# EAGLE board IO4-IR-Detector-Active-FingersN (EAGLE 7.7.0)
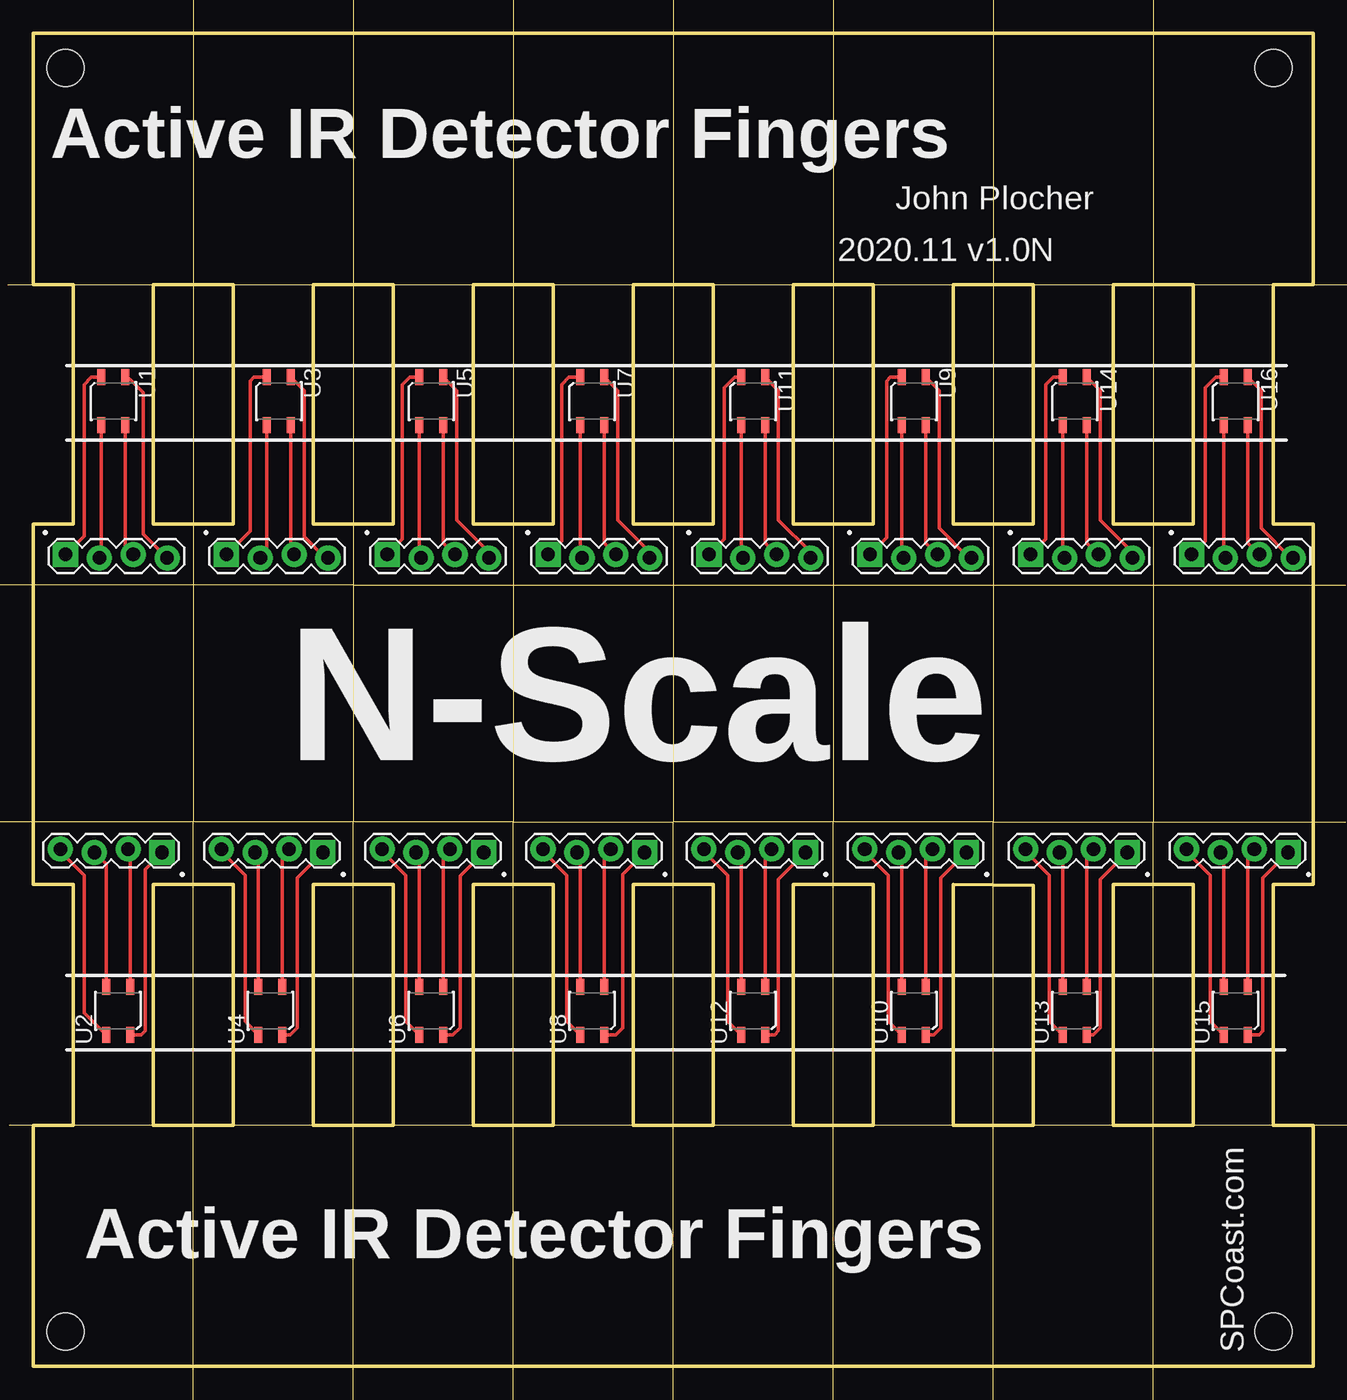
[diagram p0: board, top side]

Size 96 x 100 mm. Coordinates in mm from the lower left corner, seen from the top.
Outline: 9,63.18 9,81.15 15,81.15 15,63.18 9,63.18
Outline: 3,81.15 3,63.18 0,63.18 0,36.13 3,36.13 3,18.09 0,18.09 0,0 96,0 96,18.09 93,18.09 93,36.13 96,36.13 96,63.18 93,63.18 93,81.15 96,81.15 96,100 0,100 0,81.15 3,81.15
Outline: 9,18.09 9,36.13 15,36.13 15,18.09 9,18.09
Outline: 21,63.18 21,81.15 27,81.15 27,63.18 21,63.18
Outline: 21,18.09 21,36.13 27,36.13 27,18.09 21,18.09
Outline: 33,63.18 33,81.15 39,81.15 39,63.18 33,63.18
Outline: 33,18.09 33,36.13 39,36.13 39,18.09 33,18.09
Outline: 45,18.09 45,36.13 51,36.13 51,18.09 45,18.09
Outline: 45,63.18 45,81.15 51,81.15 51,63.18 45,63.18
Outline: 69,63.18 69,81.15 75,81.15 75,63.18 69,63.18
Outline: 63,81.15 63,63.18 57,63.18 57,81.15 63,81.15
Outline: 63,36.13 63,18.09 57,18.09 57,36.13 63,36.13
Outline: 69,18.09 69,36.13 75,36.07 75,18.09 69,18.09
Outline: 81,18.09 81,36.13 87,36.13 87,18.09 81,18.09
Outline: 81,63.18 81,81.15 87,81.15 87,63.18 81,63.18
Copper layers (1*16): Top 0.035mm / dielectric 1.5mm / Bottom 0.035mm
Design rules "default *": minimum track width 10mil, minimum drill 0.6mm, track to track 8mil, track to pad 8mil, pad to pad 8mil, via to via 8mil, smd to smd 8mil, copper to edge 8mil, drill to drill 8mil, minimum pad ring 10mil, minimum via ring 8mil, stop-mask expansion 4mil, vias tented up to drill 0mil, thermal gap 10mil
Holes 2.8 mm at 2.41,97.41 93,97.41 93,2.59 2.41,2.59
Milling: 29 lines

## Footprints (pad centres in the part's own frame; a part is rotated, then mirrored left to right if it is on the bottom)
1X04_LOCK = drill 1.016 pad 1.88 square: 1 0,0.127 | drill 1.016 pad 1.88: 2 2.54,-0.127; 3 5.08,0.127; 4 7.62,-0.127
QRE1113 = smd 1.2 x 0.6: 1 -1.8,-0.9; 2 1.8,-0.9; 3 1.8,0.9; 4 -1.8,0.9

## Placement (x,y rotation side)
J1  0.100  [1X04_LOCK]  2.41,60.77 0 top
J2  0.100  [1X04_LOCK]  9.65,38.67 180 top
J3  0.100  [1X04_LOCK]  14.48,60.77 0 top
J4  0.100  [1X04_LOCK]  21.72,38.67 180 top
J5  0.100  [1X04_LOCK]  26.54,60.77 0 top
J6  0.100  [1X04_LOCK]  33.78,38.67 180 top
J7  0.100  [1X04_LOCK]  38.61,60.77 0 top
J8  0.100  [1X04_LOCK]  45.85,38.67 180 top
J9  0.100  [1X04_LOCK]  62.74,60.77 0 top
J10  0.100  [1X04_LOCK]  69.98,38.67 180 top
J11  0.100  [1X04_LOCK]  50.67,60.77 0 top
J12  0.100  [1X04_LOCK]  57.91,38.67 180 top
J13  0.100  [1X04_LOCK]  82.04,38.67 180 top
J14  0.100  [1X04_LOCK]  74.8,60.77 0 top
J15  0.100  [1X04_LOCK]  94.11,38.67 180 top
J16  0.100  [1X04_LOCK]  86.87,60.77 0 top
U1  QRE1113  [QRE1113]  6,72.39 270 top
U2  QRE1113  [QRE1113]  6.35,26.67 90 top
U3  QRE1113  [QRE1113]  18.41,72.39 270 top
U4  QRE1113  [QRE1113]  17.78,26.67 90 top
U5  QRE1113  [QRE1113]  29.84,72.39 270 top
U6  QRE1113  [QRE1113]  29.84,26.67 90 top
U7  QRE1113  [QRE1113]  41.91,72.39 270 top
U8  QRE1113  [QRE1113]  41.91,26.67 90 top
U9  QRE1113  [QRE1113]  66.04,72.39 270 top
U10  QRE1113  [QRE1113]  66.04,26.67 90 top
U11  QRE1113  [QRE1113]  53.98,72.39 270 top
U12  QRE1113  [QRE1113]  53.98,26.67 90 top
U13  QRE1113  [QRE1113]  78.11,26.67 90 top
U14  QRE1113  [QRE1113]  78.11,72.39 270 top
U15  QRE1113  [QRE1113]  90.17,26.67 90 top
U16  QRE1113  [QRE1113]  90.17,72.39 270 top

## Library data of the parts
J1-J16 = SPCoast
U1-U16 = SPCoast; PROD_ID: IC-09357

## Nets
N$1: J1.4 U1.4
N$2: J1.2 U1.2
N$3: J1.1 U1.1
N$4: J4.4 U4.4
N$5: J4.2 U4.2
N$6: J4.1 U4.1
N$7: J1.3 U1.3
N$8: J6.1 U6.1
N$9: J7.1 U7.1
N$10: J8.1 U8.1
N$11: J9.1 U9.1
N$12: J10.1 U10.1
N$13: J11.1 U11.1
N$14: J12.1 U12.1
N$15: J13.1 U13.1
N$16: J14.1 U14.1
N$17: J15.1 U15.1
N$18: J16.1 U16.1
N$19: J2.4 U2.4
N$20: J2.2 U2.2
N$21: J2.1 U2.1
N$22: J3.4 U3.4
N$23: J3.2 U3.2
N$24: J3.1 U3.1
N$25: J2.3 U2.3
N$26: J5.4 U5.4
N$27: J5.2 U5.2
N$28: J5.1 U5.1
N$29: J6.4 U6.4
N$30: J6.2 U6.2
N$31: J3.3 U3.3
N$32: J7.4 U7.4
N$33: J7.2 U7.2
N$34: J4.3 U4.3
N$35: J8.4 U8.4
N$36: J8.2 U8.2
N$37: J5.3 U5.3
N$38: J9.4 U9.4
N$39: J9.2 U9.2
N$40: J7.3 U7.3
N$41: J8.3 U8.3
N$42: J16.3 U16.3
N$43: J15.3 U15.3
N$44: J14.3 U14.3
N$45: J10.4 U10.4
N$46: J10.2 U10.2
N$47: J13.3 U13.3
N$48: J11.4 U11.4
N$49: J11.2 U11.2
N$50: J12.3 U12.3
N$51: J12.4 U12.4
N$52: J12.2 U12.2
N$53: J13.4 U13.4
N$54: J13.2 U13.2
N$55: J11.3 U11.3
N$56: J14.4 U14.4
N$57: J14.2 U14.2
N$58: J15.4 U15.4
N$59: J15.2 U15.2
N$60: J16.4 U16.4
N$61: J16.2 U16.2
N$62: J10.3 U10.3
N$63: J9.3 U9.3
N$64: J6.3 U6.3

## Tracks (layer width: path | path; a pad name or v marks a point on that pad's centre or on a via)
N$1
  Top 0.254: U1.4 7.25,74.03 8.26,73.03 8.26,62.42 J1.4
N$2
  Top 0.254: U1.2 5.1,60.79 J1.2
N$3
  Top 0.254: U1.1 4.34,74.19 3.81,73.66 3.81,62.29 J1.1
N$4
  Top 0.254: U4.4 15.88,25.88 15.88,36.83 14.1,38.61 J4.4
N$5
  Top 0.254: U4.2 18.68,38.3 J4.2
N$6
  Top 0.254: U4.1 19.28,24.87 19.81,25.4 19.81,36.64 J4.1
N$7
  Top 0.254: U1.3 6.9,61.49 J1.3
N$8
  Top 0.254: U6.1 31.47,24.87 32,25.4 32,36.77 J6.1
N$9
  Top 0.254: U7.1 40.15,74.19 39.62,73.66 39.62,61.91 J7.1
N$10
  Top 0.254: U8.1 43.67,24.87 44.2,25.4 44.2,36.89 J8.1
N$11
  Top 0.254: U9.1 64.28,74.19 64.01,73.91 64.01,62.17 J9.1
N$12
  Top 0.254: U10.1 67.54,24.87 68.07,25.4 68.07,36.64 J10.1
N$13
  Top 0.254: U11.1 52.6,74.19 51.82,73.41 51.82,62.04 J11.1
N$14
  Top 0.254: U12.1 55.6,24.87 55.88,25.15 55.88,36.51 J12.1
N$15
  Top 0.254: U13.1 79.48,24.87 80.01,25.4 80.01,36.51 J13.1
N$16
  Top 0.254: U14.1 76.48,74.19 75.95,73.66 75.95,62.04 J14.1
N$17
  Top 0.254: U15.1 91.93,24.87 92.2,25.15 92.2,36.64 J15.1
N$18
  Top 0.254: U16.1 88.67,74.19 87.88,73.41 87.88,61.91 J16.1
N$19
  Top 0.254: U2.4 3.81,26.51 3.81,36.83 2.03,38.61 J2.4
N$20
  Top 0.254: U2.2 7.25,38.66 J2.2
N$21
  Top 0.254: U2.1 8.11,24.87 8.38,25.15 8.38,37.27 J2.1
N$22
  Top 0.254: U3.4 20.32,73.19 20.32,62.23 21.91,60.64 J3.4
N$23
  Top 0.254: U3.2 17.52,61.14 J3.2
N$24
  Top 0.254: U3.1 16.53,74.19 16.26,73.91 16.26,62.67 J3.1
N$25
  Top 0.254: U2.3 5.45,37.67 J2.3
N$26
  Top 0.254: U5.4 31.75,73.19 31.75,63.5 34.16,61.09 J5.4
N$27
  Top 0.254: U5.2 28.95,60.78 J5.2
N$28
  Top 0.254: U5.1 28.22,74.19 27.69,73.66 27.69,62.04 J5.1
N$29
  Top 0.254: U6.4 27.94,25.88 27.94,36.83 26.16,38.61 J6.4
N$30
  Top 0.254: U6.2 30.75,38.3 J6.2
N$31
  Top 0.254: U3.3 19.32,61.14 J3.3
N$32
  Top 0.254: U7.4 43.81,73.19 43.81,63.5 46.23,61.09 J7.4
N$33
  Top 0.254: U7.2 41.01,60.78 J7.2
N$34
  Top 0.254: U4.3 16.88,38.3 J4.3
N$35
  Top 0.254: U8.4 40.01,25.88 40.01,36.83 38.23,38.61 J8.4
N$36
  Top 0.254: U8.2 42.81,38.3 J8.2
N$37
  Top 0.254: U5.3 30.75,61.77 J5.3
N$38
  Top 0.254: U9.4 67.94,73.19 67.94,62.87 70.17,60.64 J9.4
N$39
  Top 0.254: U9.2 65.14,60.78 J9.2
N$40
  Top 0.254: U7.3 42.81,61.77 J7.3
N$41
  Top 0.254: U8.3 41.01,38.3 J8.3
N$42
  Top 0.254: U16.3 91.07,61.77 J16.3
N$43
  Top 0.254: U15.3 89.27,38.3 J15.3
N$44
  Top 0.254: U14.3 79,61.77 J14.3
N$45
  Top 0.254: U10.4 64.14,25.88 64.14,36.83 62.36,38.61 J10.4
N$46
  Top 0.254: U10.2 66.94,38.3 J10.2
N$47
  Top 0.254: U13.3 77.2,38.3 J13.3
N$48
  Top 0.254: U11.4 55.88,73.19 55.88,63.5 58.29,61.09 J11.4
N$49
  Top 0.254: U11.2 53.08,60.78 J11.2
N$50
  Top 0.254: U12.3 53.08,38.3 J12.3
N$51
  Top 0.254: U12.4 52.07,25.88 52.07,36.83 50.29,38.61 J12.4
N$52
  Top 0.254: U12.2 54.88,38.3 J12.2
N$53
  Top 0.254: U13.4 76.2,25.88 76.2,36.83 74.42,38.61 J13.4
N$54
  Top 0.254: U13.2 79,38.3 J13.2
N$55
  Top 0.254: U11.3 54.88,61.77 J11.3
N$56
  Top 0.254: U14.4 80.01,73.19 80.01,63.5 82.42,61.09 J14.4
N$57
  Top 0.254: U14.2 77.2,60.78 J14.2
N$58
  Top 0.254: U15.4 88.27,25.88 88.27,36.83 86.49,38.61 J15.4
N$59
  Top 0.254: U15.2 91.07,38.3 J15.2
N$60
  Top 0.254: U16.4 92.08,73.19 92.08,62.87 94.3,60.64 J16.4
N$61
  Top 0.254: U16.2 89.27,60.78 J16.2
N$62
  Top 0.254: U10.3 65.14,38.3 J10.3
N$63
  Top 0.254: U9.3 66.94,61.77 J9.3
N$64
  Top 0.254: U6.3 28.95,38.3 J6.3

## Text on the board
tPlace: Active IR Detector Fingers | John Plocher | 2020.11 v1.0N | N-Scale | Active IR Detector Fingers | SPCoast.com
Milling: V-SCORE | V-SCORE | V-SCORE | V-SCORE | V-SCORE | V-SCORE | V-SCORE | V-SCORE | V-SCORE | V-SCORE | V-SCORE
bDocu: www.SPCoast.com | Model Railroading is Fun! | E1C C2E | E1C C2E | E1C C2E | E1C C2E | E1C C2E | E1C C2E | E1C C2E | E1C C2E | E1C C2E | E1C C2E | E1C C2E | E1C C2E | E1C C2E | E1C C2E | E1C C2E | E1C C2E | 2018-02 | John Plocher | Made in the PRC, Coast Division, NMRA